# EAGLE board virus-pcb v20 (EAGLE 9.7.0)
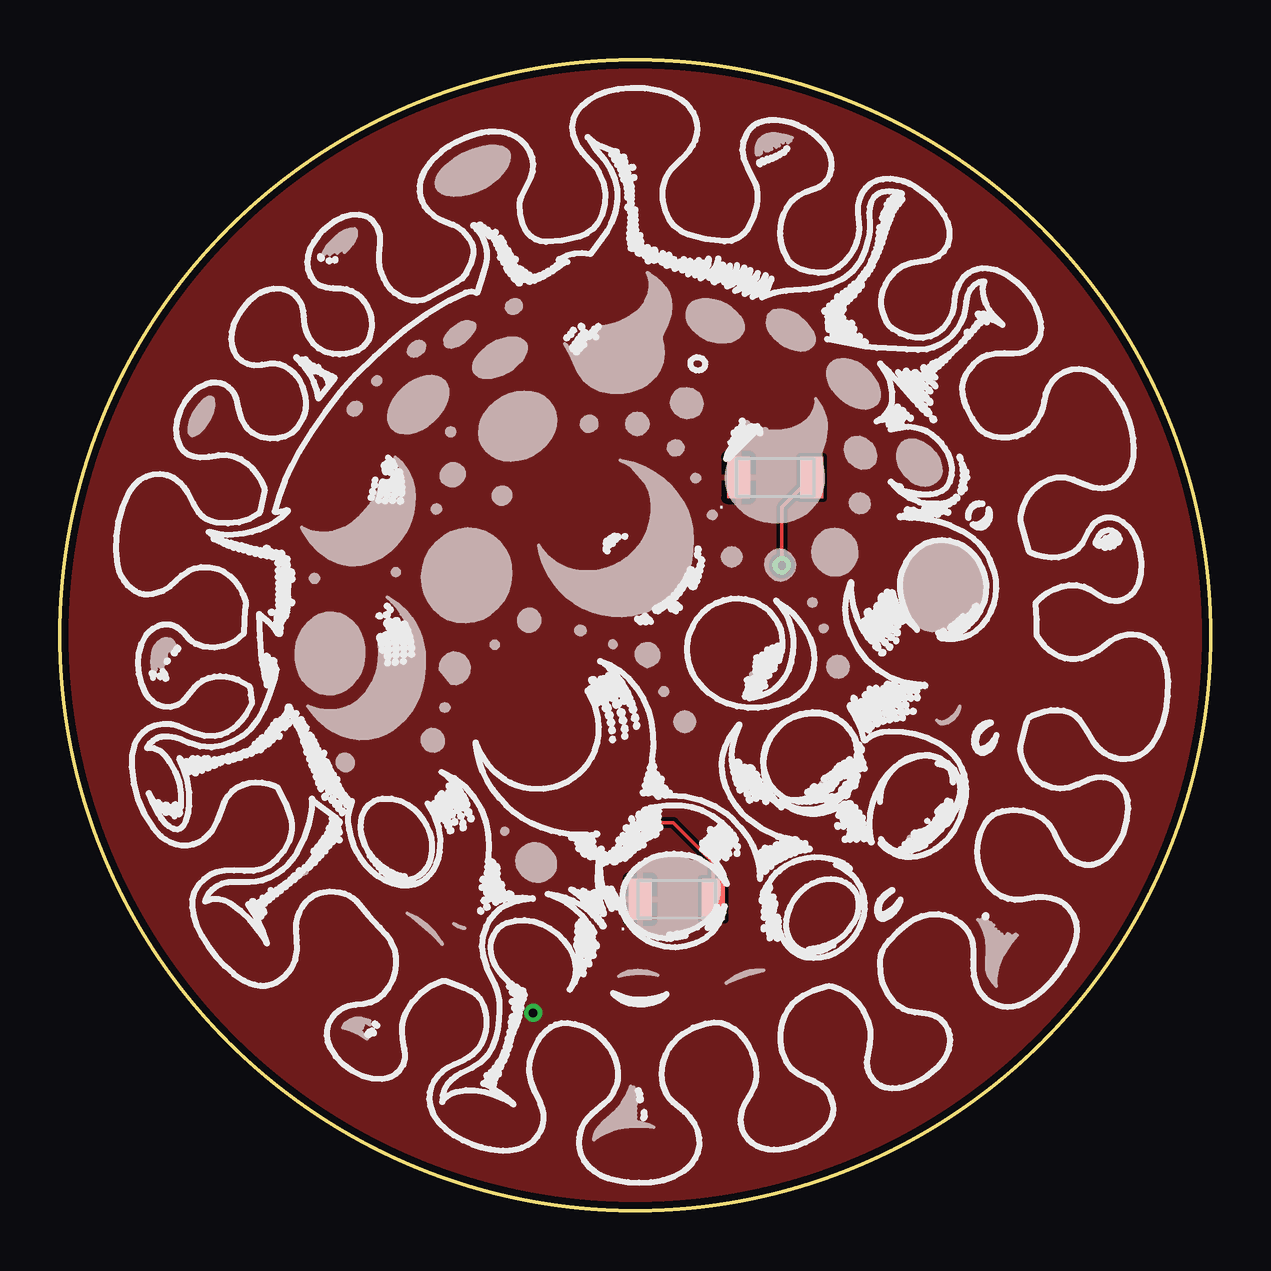
[diagram p0: board, top side]
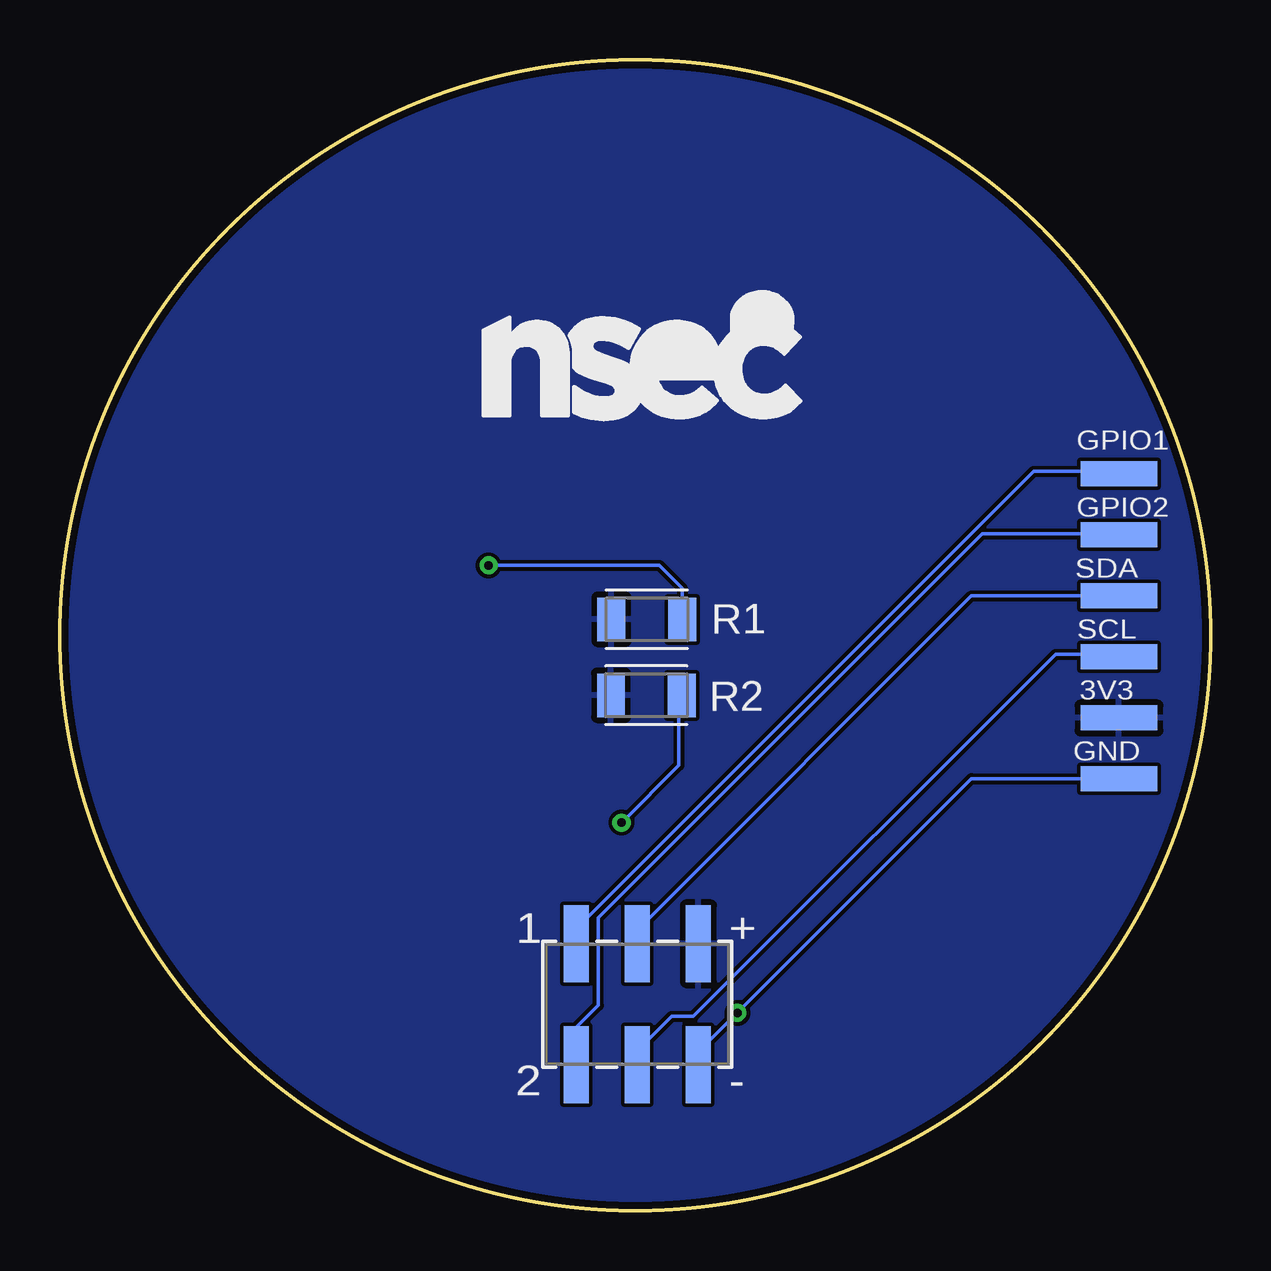
[diagram p1: board, bottom side, seen from below]

Size 47.94 x 47.94 mm. Coordinates in mm from the lower left corner, seen from the top.
Outline: circle at 23.97,23.97 radius 23.97
Copper layers (1*16): Top 0.035mm / dielectric 1.5mm / Bottom 0.035mm
Design rules "default *": minimum track width 6mil, minimum drill 0.35mm, track to track 6mil, track to pad 6mil, pad to pad 6mil, via to via 6mil, smd to smd 6mil, copper to edge 0.3mm, drill to drill 6mil, minimum pad ring 10mil, minimum via ring 8mil, stop-mask expansion 4mil, vias tented up to drill 0mil, thermal gap 10mil

## Footprints (pad centres in the part's own frame; a part is rotated, then mirrored left to right if it is on the bottom)
LEDC3216X75N_FLAT-R = smd 0.962 x 1.712: A 1.525,0; C -1.525,0
CONN6_M20-8760342_HRW = smd 1.041 x 3.2: 1 -2.54,2.525; 2 -2.54,-2.525; 3 0,2.525; 4 0,-2.525; 5 2.54,2.525; 6 2.54,-2.525
SAOPADBREAKOUT = smd 1.041 x 3.2: 1 -6.35,0; 2 -3.81,0; 3 -1.27,0; 4 1.27,0; 5 3.81,0; 6 6.35,0
RESC3216X70 = smd 1.165 x 1.815: 1 -1.475,0; 2 1.475,0

## Placement (x,y rotation side)
D1  LED_RED  [LEDC3216X75N_FLAT-R]  29.8,30.54 0 top
D2  LED_RED  [LEDC3216X75N_FLAT-R]  25.7,12.97 0 top
J1  M20-8760342CONN6_M20-8760342_HRW  [CONN6_M20-8760342_HRW]  23.88,8.59 0 bottom
J2  SAOPADBREAKOUT  [SAOPADBREAKOUT]  3.82,24.34 270 bottom
R1  [RESC3216X70]  23.49,24.63 0 bottom
R2  [RESC3216X70]  23.51,21.47 0 bottom

## Library data of the parts
D1 D2 = led; CATEGORY: LED; COLOR: RED; DESCRIPTION: CHIP LED FLAT; SUB-CATEGORY: CHIP; TYPE: FLAT_TOP
J1 = Library; COPYRIGHT: Copyright (C) 2024 Ultra Librarian. All rights reserved.; MANUFACTURER_PART_NUMBER: M20-8760342; MFR_NAME: Harwin
J2 = Library
R1 R2 = Resistor; CATEGORY: Resistor; SUB-CATEGORY: Fixed

## Nets
3V3: J1.5 J2.5 R1.1 R2.1
GND: D1.C D2.C J1.6 J2.6
GPIO1: J1.1 J2.1
GPIO2: J1.2 J2.2
N$1: D2.A R2.2
N$2: D1.A R1.2
SCL: J1.4 J2.4
SDA: J1.3 J2.3

## Tracks (layer width: path | path; a pad name or v marks a point on that pad's centre or on a via)
3V3
  pour Bottom: -8.3,-18 61.4,-18 61.4,56.78 -8.3,56.78
GND  (via drill 0.35)
  Top 0.152: 24.14,12.66 24.14,12.96 D2.C
  Bottom 0.152: J2.6 9.96,17.99 v19.72,8.24 21.24,6.71 21.24,6.11 J1.6
  pour Top: -4.49,-10.38 56.32,-10.38 56.32,51.7 -4.49,51.7
GPIO1
  Bottom 0.152: J1.1 26.42,11.74 7.37,30.79 3.87,30.79 J2.1
GPIO2
  Bottom 0.152: J1.2 26.42,7.63 25.51,8.54 25.51,12.2 9.51,28.2 3.87,28.2 J2.2
N$1  (via drill 0.35)
  Top 0.152: D2.A 27.22,14.5 25.56,16.16 v24.54,16.16
  Bottom 0.152: v24.54,16.16 22.15,18.55 22.15,21.35 R2.2
N$2  (via drill 0.35)
  Top 0.152: D1.A 30.08,29.3 v30.08,26.88
  Bottom 0.152: R1.2 22.01,25.93 22.97,26.88 v30.08,26.88
SCL
  Bottom 0.152: J2.4 3.87,23.17 6.46,23.17 21.54,8.09 22.46,8.09 23.83,6.71 23.83,6.11 J1.4
SDA
  Bottom 0.152: J2.3 9.96,25.61 23.83,11.74 23.83,11.13 J1.3

## Text on the board
bStop: virus